# Allegro board sanT_4ch.brd
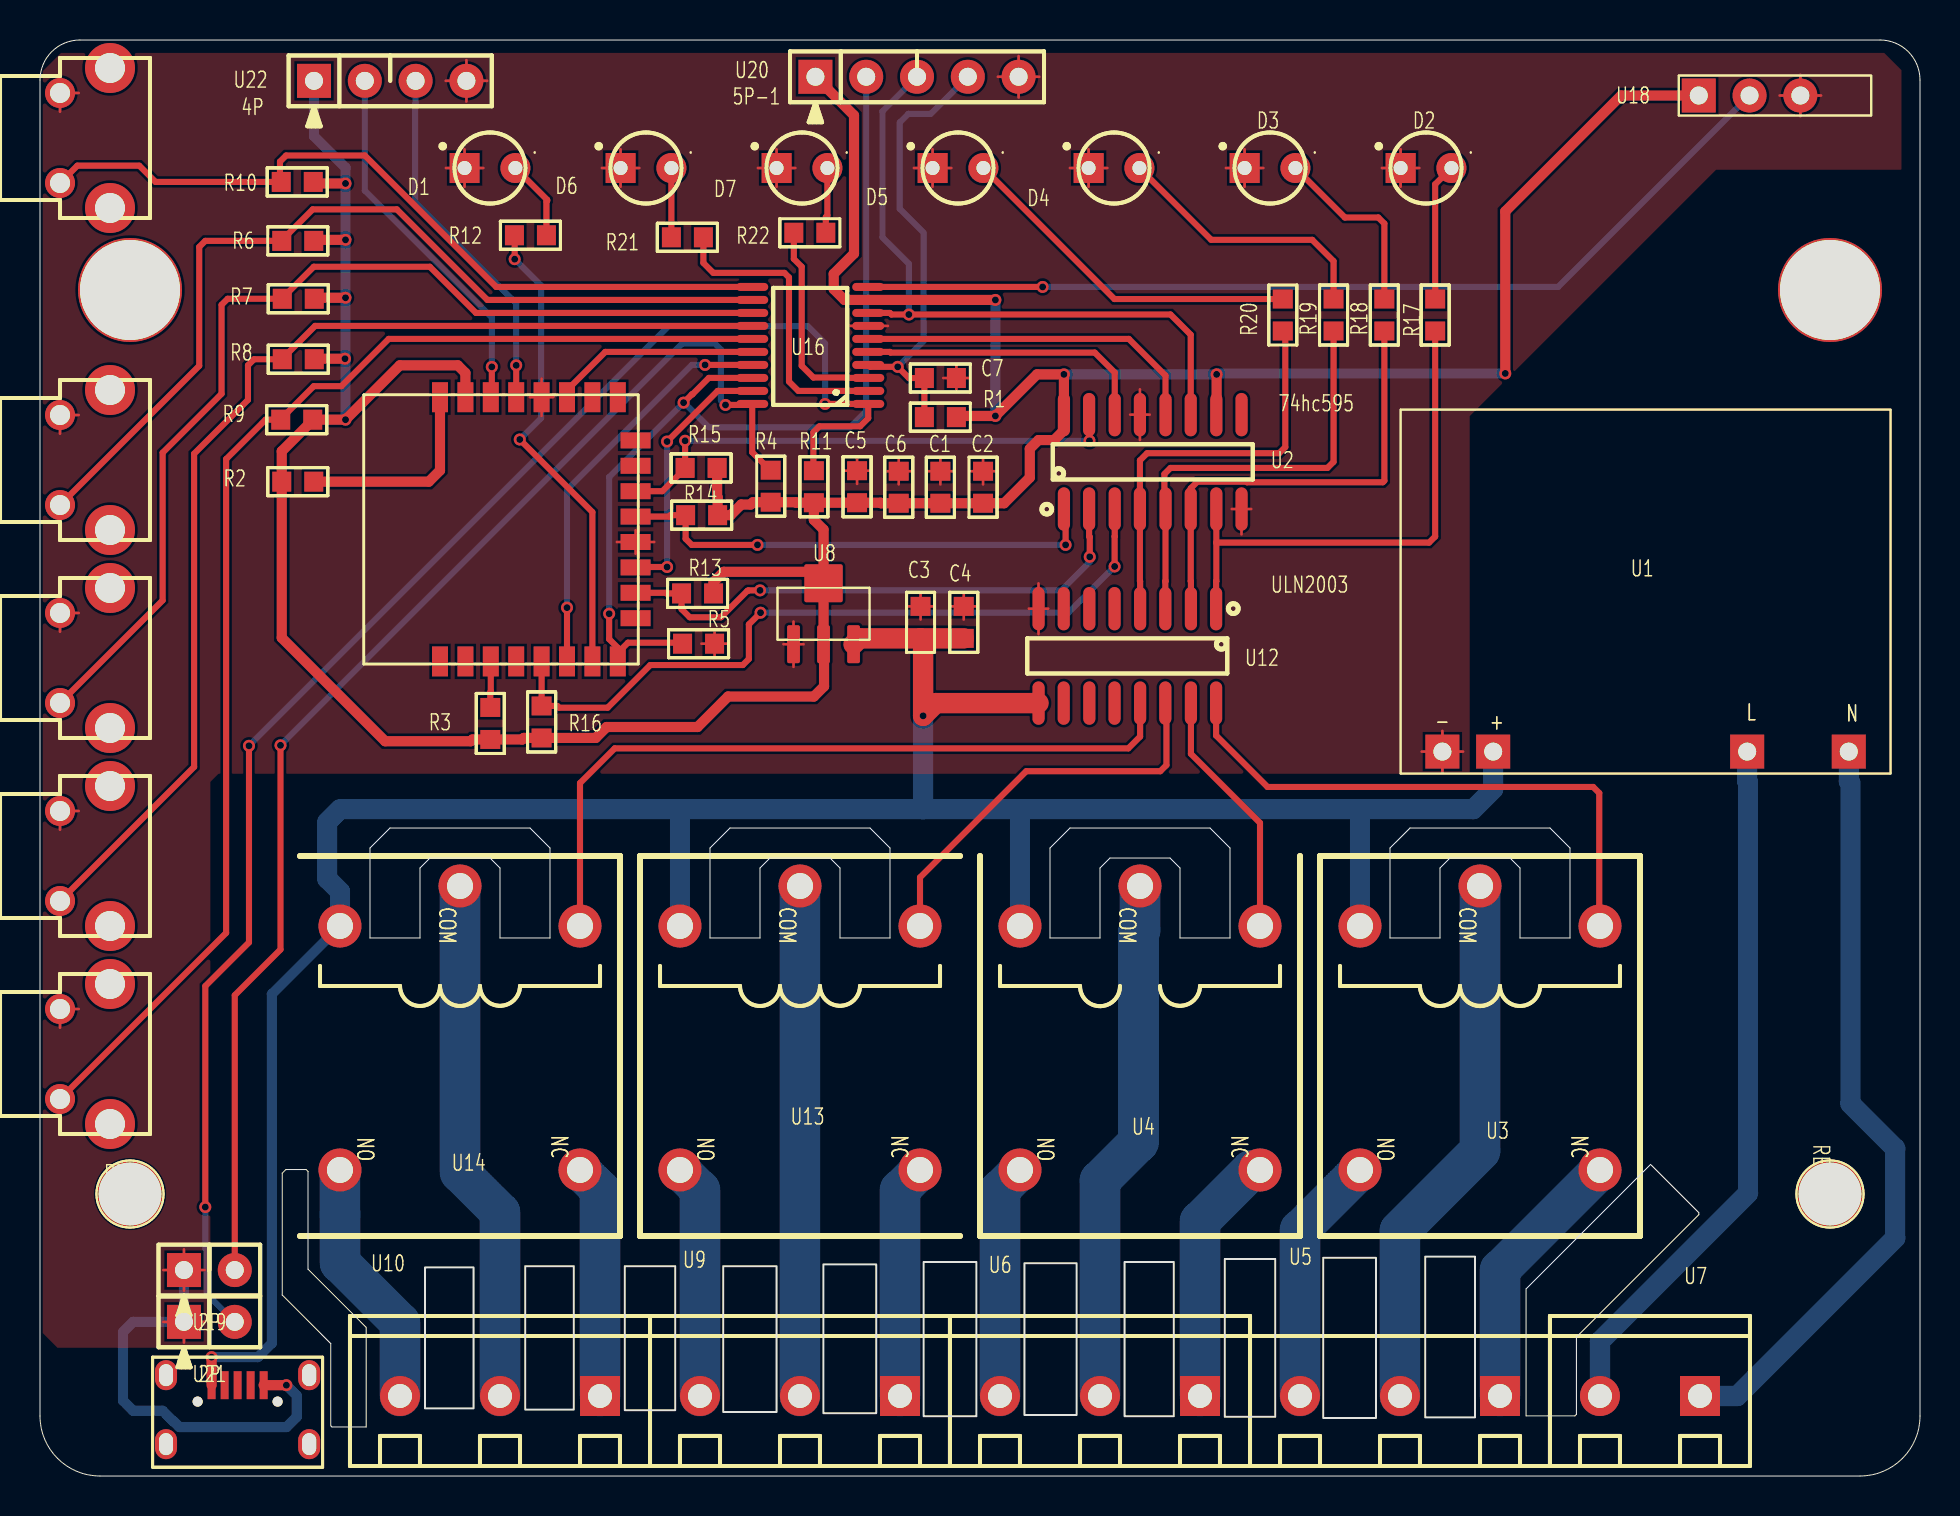
[diagram p0: board, top side]
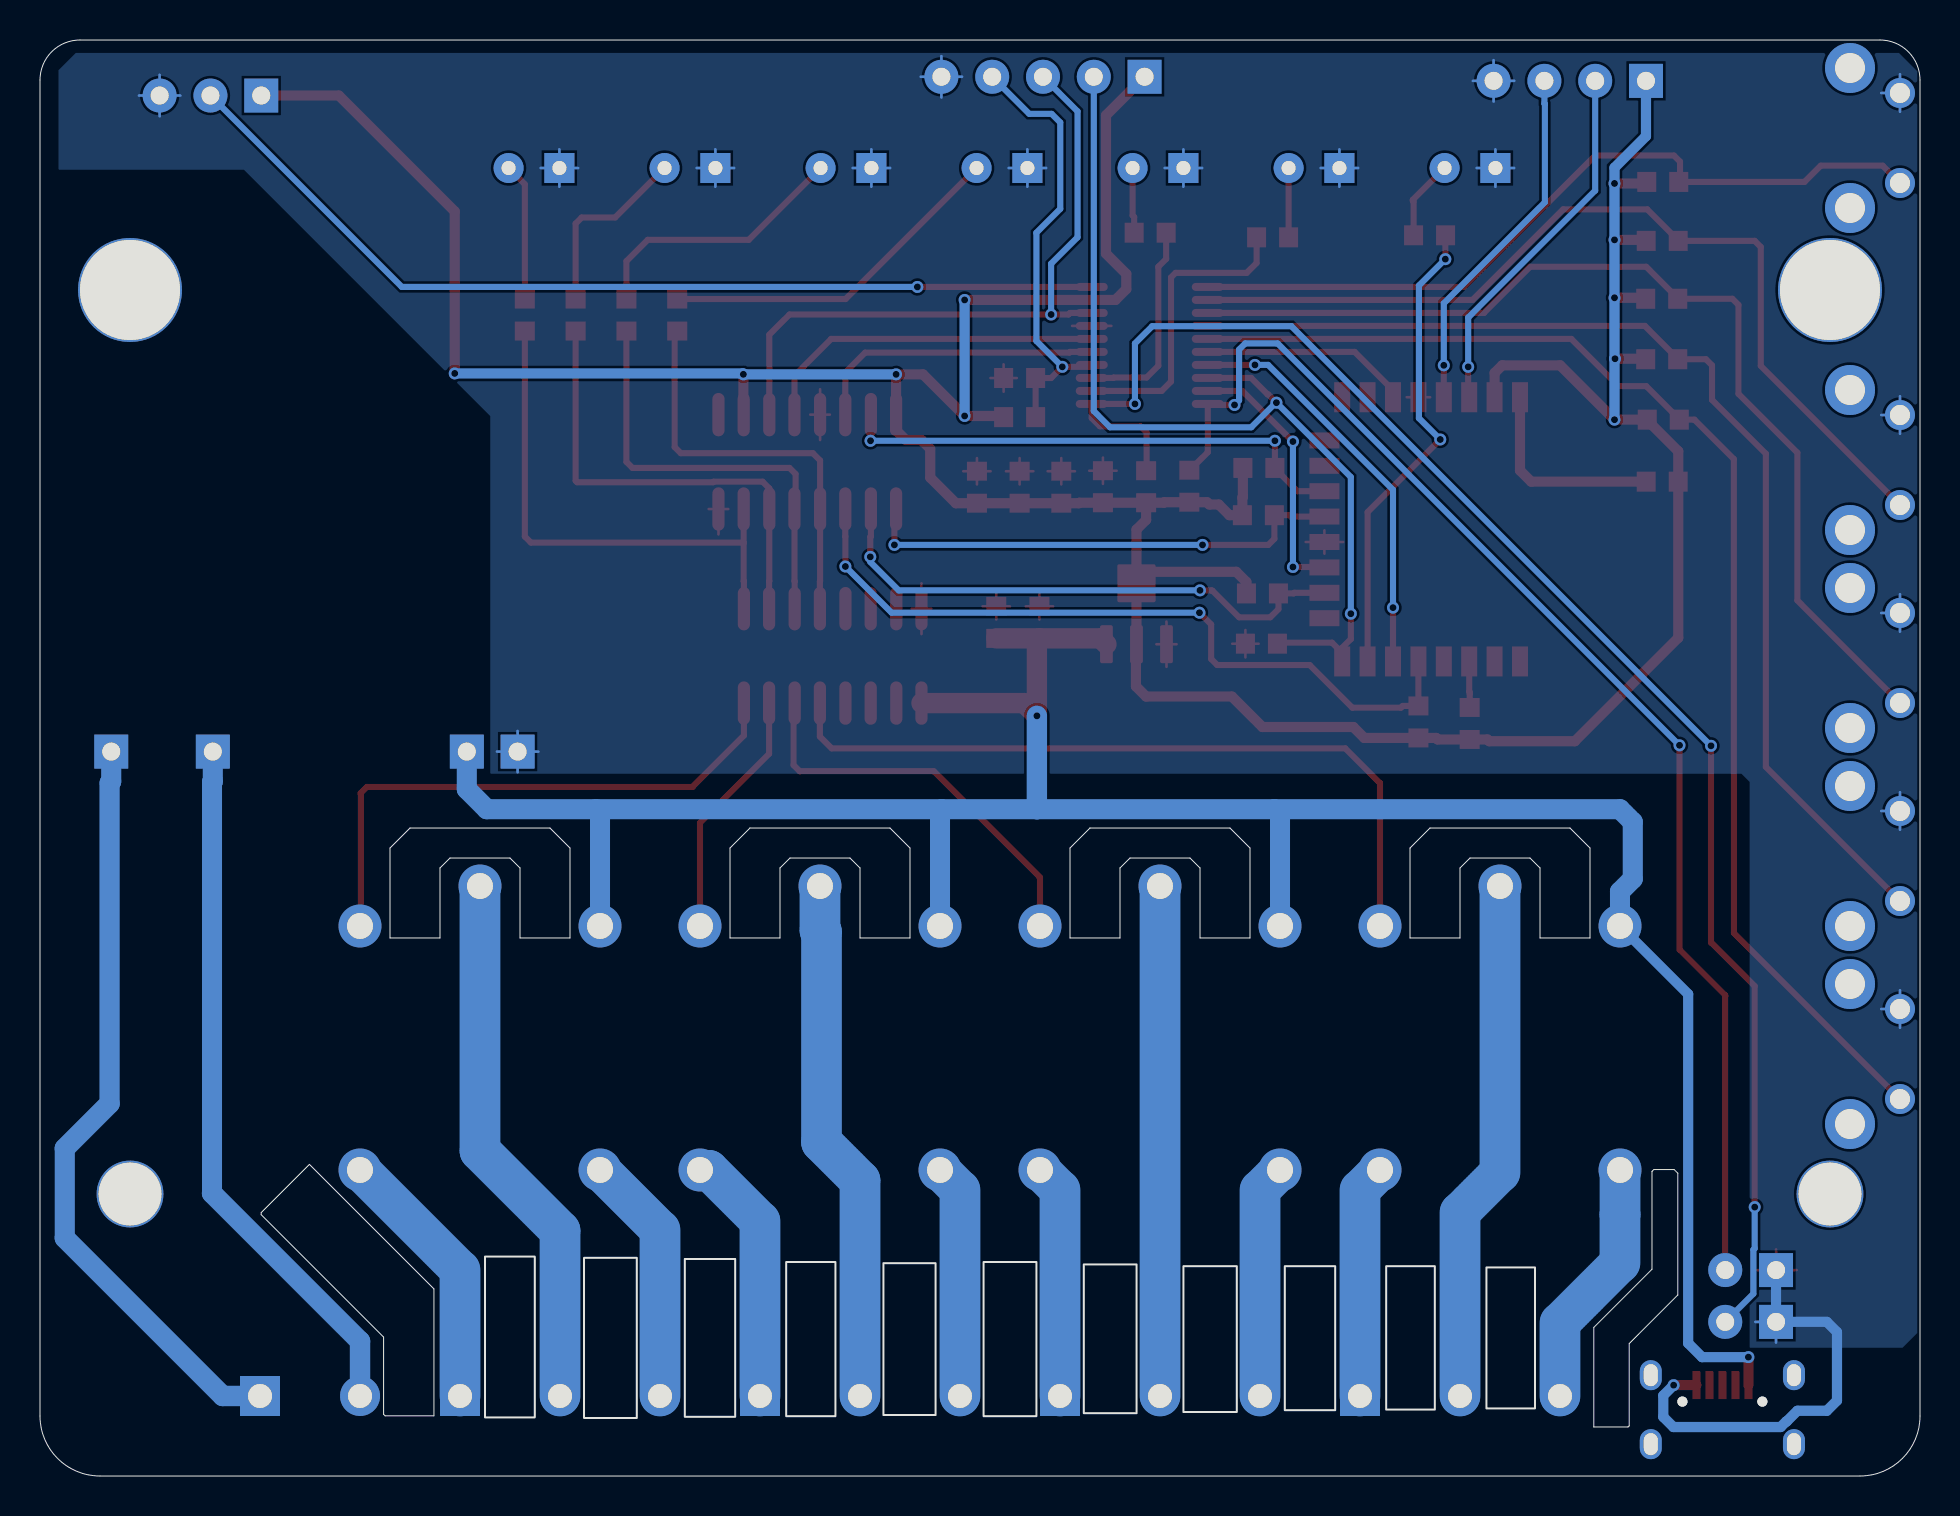
[diagram p1: board, bottom side, seen from below]

Outline 94 x 71.8 mm; copper layers: TOP, BOTTOM. Coordinates in mm from the lower left corner of the outline.
Outline path: rectangle 19.25,3.38 21.68,10.43 ; rectangle 24.26,3.32 26.69,10.49 ; rectangle 29.24,3.29 31.76,10.49 ; rectangle 34.16,3.2 36.83,10.49 ; rectangle 39.17,3.14 41.81,10.58 ; rectangle 44.18,2.99 46.82,10.7 ; rectangle 49.22,3.05 51.83,10.64 ; rectangle 54.23,2.99 56.69,10.7 ; rectangle 59.24,2.96 61.76,10.85 ; rectangle 64.16,2.9 66.8,10.91 ; rectangle 69.26,2.93 71.75,10.97 ; 0,69.8 arc(0.58,71.21) 2,71.8 92,71.8 arc(93.42,71.21) 94,69.8 94,3 arc(93.12,0.88) 91,0 3,0 arc(0.88,0.88) 0,3 0,69.8 ; 12.11,15.14 12.29,15.32 13.31,15.32 13.4,15.23 13.4,10.34 16.31,7.43 16.31,2.45 14.6,2.45 14.54,2.51 14.54,6.62 12.11,9.05 12.11,15.14 ; 16.5,31.4 16.5,26.9 19,26.9 19,30.4 19.5,30.9 22.5,30.9 23,30.4 23,26.9 25.5,26.9 25.5,31.4 24.5,32.4 17.5,32.4 16.5,31.4 ; 33.5,31.4 33.5,26.9 36,26.9 36,30.4 36.5,30.9 39.5,30.9 40,30.4 40,26.9 42.5,26.9 42.5,31.4 41.5,32.4 34.5,32.4 33.5,31.4 ; 50.5,31.4 50.5,26.9 53,26.9 53,30.4 53.5,30.9 56.5,30.9 57,30.4 57,26.9 59.5,26.9 59.5,31.4 58.5,32.4 51.5,32.4 50.5,31.4 ; 67.5,31.4 67.5,26.9 70,26.9 70,30.4 70.5,30.9 73.5,30.9 74,30.4 74,26.9 76.5,26.9 76.5,31.4 75.5,32.4 68.5,32.4 67.5,31.4 ; 74.31,9.36 80.53,15.58 82.94,13.17 82.94,13.07 76.82,6.94 76.82,3.08 76.74,3.01 74.31,3.01 74.31,9.36

## Placement (name value [footprint] x y rotation side)
C1  10UF/25V/0603  [STD0603]  45.02 49.44 90 top
C2  100NF/50V/0603  [STD0603]  47.15 49.44 90 top
C3  10UF/25V/0603  [STD0603]  44.03 42.68 90 top
C4  100NF/50V/0603  [STD0603]  46.19 42.68 90 top
C5  10UF/25V/0603  [STD0603]  40.85 49.46 90 top
C6  100NF/50V/0603  [STD0603]  42.94 49.44 90 top
C7  10UF/250V/0603  [STD0603]  45.02 54.9 0 top
D1  LED  [LED_3MM]  22.5 65.4 0 top
D2  LED  [LED_3MM]  69.3 65.4 0 top
D3  LED  [LED_3MM]  61.5 65.4 0 top
D4  LED  [LED_3MM]  53.7 65.4 0 top
D5  LED  [LED_3MM]  45.9 65.4 0 top
D6  LED  [LED_3MM]  30.3 65.4 0 top
D7  LED  [LED_3MM]  38.1 65.4 0 top
R1  1k/J/0603  [STD0603]  45.02 52.94 180 top
R2  10k/J/0603  [STD0603]  12.89 49.72 0 top
R3  10k/J/0603  [STD0603]  22.51 37.63 90 top
R4  1k/J/0603  [STD0603]  36.54 49.49 90 top
R5  10k/J/0603  [STD0603]  32.93 41.62 0 top
R6  1k/J/0603  [STD0603]  12.89 61.76 180 top
R7  1k/J/0603  [STD0603]  12.91 58.86 180 top
R8  1k/J/0603  [STD0603]  12.91 55.84 180 top
R9  1k/J/0603  [STD0603]  12.84 52.82 180 top
R10  1k/J/0603  [STD0603]  12.86 64.7 180 top
R11  1k/J/0603  [STD0603]  38.69 49.46 90 top
R12  1k/J/0603  [STD0603]  24.52 62.04 0 top
R13  1k/J/0603  [STD0603]  32.88 44.13 180 top
R14  1k/J/0603  [STD0603]  33.08 48.04 180 top
R15  1k/J/0603  [STD0603]  33.06 50.4 180 top
R16  1k/J/0603  [STD0603]  25.08 37.7 90 top
R17  1k/J/0603  [STD0603]  69.76 58.05 90 top
R18  1k/J/0603  [STD0603]  67.22 58.05 90 top
R19  1k/J/0603  [STD0603]  64.68 58.05 90 top
R20  1k/J/0603  [STD0603]  62.14 58.05 90 top
R21  1k/J/0603  [STD0603]  32.37 61.94 180 top
R22  1k/J/0603  [STD0603]  38.49 62.16 0 top
REF  -  [unnamed]  89.5 14.1 0 top
REF#2  -  [unnamed#2]  89.5 59.3 0 top
REF#3  -  [unnamed]  4.5 14.1 0 top
REF#4  -  [unnamed#2]  4.5 59.3 0 top
SW1  SW PUSHBUTTON  [TS-039]  1 50.8 270 top
SW2  SW PUSHBUTTON  [TS-039]  1 40.9 270 top
SW3  SW PUSHBUTTON  [TS-039]  1 31 270 top
SW4  SW PUSHBUTTON  [TS-039]  1 21.1 270 top
SW5  SW PUSHBUTTON  [TS-039]  1 66.9 270 top
U1  AC-DC5V  [AC_DC5V_RPD]  80.28 44.22 0 top
U2  74hc595  [SOIC127P600X175-16]  55.64 50.71 0 top
U3  SL-5V-RELAY  [HK3FF]  64 31 270 top
U4  SL-5V-RELAY  [HK3FF]  47 31 270 top
U5  3P  [TERMINAL-3P-5MM]  73 4 180 top
U6  3P  [TERMINAL-3P-5MM]  58 4 180 top
U7  2P  [TERMINAL-2P-5MM]  83 4 180 top
U8  AMS1117  [SOT89_AM1117]  39.18 43.11 0 top
U9  3P  [TERMINAL-3P-5MM]  43 4 180 top
U10  3P  [TERMINAL-3P-5MM]  28 4 180 top
U11  MICRO  [MICROUSB_B_4DIP]  9.88 4.54 0 top
U12  ULN2003  [SOIC127P600X175-16]  54.37 41.01 180 top
U13  SL-5V-RELAY  [HK3FF]  30 31 270 top
U14  SL-5V-RELAY  [HK3FF]  13 31 270 top
U16  N76E003  [TSOP65P640X120-20N]  38.21 56.8 180 top
U17  PSFB04  [PSF]  16.19 40.6 0 top
U18  433MODULE  [433MODULE_SYN480]  84.06 67.52 180 top
U19  2P  [ZCZ254-1X2]  7.2 10.3 0 top
U20  5P-1  [ZCZ254-1X5]  38.77 69.96 0 top
U21  2P  [ZCZ254-1X2]  7.2 7.71 0 top
U22  4P  [ZCZ254-1X4]  13.7 69.76 0 top

## Library data of the parts
C1-C7 = CAP NP
D1-D7 = LED
R1-R22 = R
SW1-SW5 = SW PUSHBUTTON
U1 = AC-DC5V
U2 = 74hc595: User Part Number: pn; Tolerance: RichardLC
U3 U4 U13 U14 = SL-5V-RELAY
U5 U6 U9 U10 = 3P
U7 = 2P
U8 = AMS1117
U11 = MICRO-USB
U12 = ULN2003: User Part Number: pn; Tolerance: RichardLC
U16 = N76E003
U17 = PSFB04
U18 = 433MODULE
U19 U21 = 2P: User Part Number: pn; Tolerance: RichardLC
U20 = 5P-1: User Part Number: pn; Tolerance: RichardLC
U22 = 4P-1: User Part Number: pn; Tolerance: RichardLC

## Footprints (pads in the part's own frame, mm; a bottom-side part is the same pattern mirrored in y, then rotated)
433MODULE_SYN480
  rect 1.699x1.699 hole 0.899: 1(1.12,-1.501)
  round 1.699 hole 0.899: 2(-1.42,-1.501) 3(-3.96,-1.501)
AC_DC5V_RPD
  rect 1.699x1.699 hole 0.899: 1(5.08,-8.001) 2(10.16,-8.001) 3(-7.62,-8.001) 4(-10.16,-8.001)
HK3FF
  round 2.149 hole 1.3: 1(1.501,8.001) 2(3.5,1.999) 3(15.7,1.999) 4(15.7,14) 5(3.5,14)
LED_3MM
  rect 1.501x1.501 hole 0.701: 1(-1.27,0)
  round 1.501 hole 0.701: 2(1.27,0)
MICROUSB_B_4DIP
  oval 1.1x1.501 hole 0.701x1.1: (-3.579,0.5) (-3.579,-2.949) (3.579,0.5) (3.579,-2.949)
  round 0.5 hole 0.701 unplated: (-1.999,-0.82) (1.999,-0.82)
  rect 0.399x1.4 smd: 1(-1.3,0) 2(-0.65,0) 3(0,0) 4(0.65,0) 5(1.3,0)
PSF
  rect 0.8x1.501 smd: 1(3.81,0.13) 2(5.08,0.13) 3(6.35,0.13) 4(7.62,0.13) 5(8.89,0.13) 6(10.16,0.13) 7(11.43,0.13) 8(12.7,0.13) 17(12.7,13.34) 18(11.43,13.34) 19(10.16,13.34) 20(8.89,13.34) 21(7.62,13.34) 22(6.35,13.34) 23(5.08,13.34) 24(3.81,13.34)
  rect 1.501x0.8 smd: 9(13.589,2.291) 10(13.589,3.561) 11(13.589,4.831) 12(13.589,6.101) 13(13.589,7.371) 14(13.589,8.641) 15(13.589,9.911) 16(13.589,11.181)
SOIC127P600X175-16
  oval 0.61x2.169 smd: 1(-4.44,-2.36) 2(-3.18,-2.36) 3(-1.9,-2.36) 4(-0.64,-2.36) 5(0.64,-2.36) 6(1.9,-2.36) 7(3.18,-2.36) 8(4.44,-2.36) 9(4.44,2.36) 10(3.18,2.36) 11(1.9,2.36) 12(0.64,2.36) 13(-0.64,2.36) 14(-1.9,2.36) 15(-3.18,2.36) 16(-4.44,2.36)
SOT89_AM1117
  custom 0.64x1.9 smd: 1(-1.501,-1.524) 2(0,-1.524) 3(1.501,-1.524)
  custom 1.92x1.9 smd: 4(0,1.524)
STD0603
  rect 0.95x1.001 smd: 1(-0.8,0) 2(0.8,0)
TERMINAL-2P-5MM
  rect 1.999x1.999 hole 1.199: 1(0,0)
  round 1.999 hole 1.199: 2(5.001,0)
TERMINAL-3P-5MM
  rect 1.999x1.999 hole 1.199: 1(0,0)
  round 1.999 hole 1.199: 2(5.001,0) 3(10,0)
TS-039
  round 2.499 hole 1.501: (-3.5,2.499) (3.5,2.499)
  round 1.501 hole 1.001: 1(-2.25,0) 2(2.25,0)
TSOP65P640X120-20N
  oval 1.6x0.399 smd: 1(-3.2,3.2) 2(-3.2,2.55) 3(-3.2,1.9) 4(-3.2,1.25) 5(-3.2,0.599) 6(-3.2,-0.051) 7(-3.2,-0.701) 8(-3.2,-1.349) 9(-3.2,-1.999) 10(-3.2,-2.649) 11(2.601,-2.649) 12(2.601,-1.999) 13(2.601,-1.349) 14(2.601,-0.701) 15(2.601,-0.051) 16(2.601,0.599) 17(2.601,1.25) 18(2.601,1.9) 19(2.601,2.55) 20(2.601,3.2)
unnamed
  round 3.34 hole 3.139 unplated: (0,0)
unnamed#2
  round 5.199 hole 5.001 unplated: (0,0)
ZCZ254-1X2
  rect 1.699x1.699 hole 0.899: 1(0,0)
  round 1.699 hole 0.899: 2(2.54,0)
ZCZ254-1X4
  rect 1.699x1.699 hole 0.899: 1(0,0)
  round 1.699 hole 0.899: 2(2.54,0) 3(5.08,0) 4(7.62,0)
ZCZ254-1X5
  rect 1.699x1.699 hole 0.899: 1(0,0)
  round 1.699 hole 0.899: 2(2.54,0) 3(5.08,0) 4(7.62,0) 5(10.16,0)

## Nets
GND: C1.2 C2.2 C3.2 C4.2 C5.2 C6.2 C7.2 D1.1(CATHODE) D2.1(CATHODE) D3.1(CATHODE) D4.1(CATHODE) D5.1(CATHODE) D6.1(CATHODE) D7.1(CATHODE) R5.2 SW1.1 SW2.1 SW3.1 SW4.1 SW5.1 U1.4(GND) U2.8(GND) U2.13(OE) U8.1(GND) U11.5(GND) U12.8(E) U16.7(GND) U17.12(GND#12) U17.20(GND#20) U18.3(GND) U19.1(COM) U20.5 U21.1(COM) U22.4
VCC3V3: C1.1 C2.1 C5.1 C6.1 R1.1 R2.1 R3.1 R4.1 R6.1 R7.1 R8.1 R9.1 R10.1 R11.1 R13.1 R14.1 R15.1 R16.1 U2.10(SCLR) U2.16(VCC) U8.2(VOUT0) U8.4(VOUT1) U16.9(VDD) U17.23(VCC) U18.1(VCC) U20.1 U22.1
VCC5V: C3.1 C4.1 U1.3(5V) U3.2(C+) U4.2(C+) U8.3(VIN) U11.1(VBUS) U12.9(COM) U13.2(C+) U14.2(C+)
433DATA: U16.10(P1.5) U18.2(DATA)
433LED: R22.1 U16.3(P0.7/RXD)
COM1: U3.1(COM) U5.2
COM2: U4.1(COM) U6.2
COM3: U9.2 U13.1(COM)
COM4: U10.2 U14.1(COM)
CON_KEY1: R6.2 SW1.2 U16.12(P1.3)
CON_KEY2: R7.2 SW2.2 U16.13(P1.2)
CON_KEY3: R8.2 SW3.2 U16.14(P1.1)
CON_KEY4: R9.2 SW4.2 U16.15(SPCLK/P1.0)
CON_KEY5: R10.2 SW5.2 U16.11(P1.4)
CON_RELAY1: R17.1 U2.7(QH) U12.1(1B)
CON_RELAY2: R18.1 U2.6(QG) U12.2(2B)
CON_RELAY3: R19.1 U2.5(QF) U12.3(3B)
CON_RELAY4: R20.1 U2.4(QE) U12.4(4B)
KEY1: R13.2 U2.2(QC) U17.10(IO0)
KEY2: R14.2 U2.1(QB) U17.13(IO9)
KEY3: R15.2 U2.15(QA) U17.14(IO10)
KEY4: R16.2 U2.3(QD) U17.5(IO14)
L: U1.1(L) U7.2(OPEN)
LIMIT1: R4.2 U16.20(P0.4) U19.2(OPEN)
LIMIT2: R11.2 U16.1(P0.5) U21.2(OPEN)
MODE_LED: R21.1 U16.2(P0.6/TXD)
N: U1.2(N) U7.1(COM)
NC1: U3.4(N_C) U5.1
NC2: U4.4(N_C) U6.1
NC3: U9.1 U13.4(N_C)
NC4: U10.1 U14.4(N_C)
NO1: U3.3(N_O) U5.3
NO2: U4.3(N_O) U6.3
NO3: U9.3 U13.3(N_O)
NO4: U10.3 U14.3(N_O)
R1: U3.5(C-) U12.16(1C)
R2: U4.5(C-) U12.15(2C)
R3: U12.14(3C) U13.5(C-)
R4: U12.13(4C) U14.5(C-)
RCK: U2.12(RCK) U16.6(P1.7/INT1)
RELAY1: U16.17(P0.1) U17.6(IO12)
RELAY2: U16.16(P0.0) U17.19(IO5)
RELAY3: U16.19(P0.3) U17.11(IO4)
RELAY4/CLK: R5.1 U16.18(ICPCK/P0.2) U17.8(IO15) U20.2
RST: C7.1 R1.2 U16.4(P2.0/RST) U20.4
RX: U17.21(RX) U22.3
SCK/DAT: U2.11(SCK) U16.8(P1.6/ICPDA/TXD-1) U20.3
SI: U2.14(SI) U16.5(P3.0/INTO)
SLED: R12.1 U17.7(IO13)
TX: U17.22(TX) U22.2
N03085: R2.2 U17.24(RESET)
N03089: R3.2 U17.3(EN)
N30331: D6.2(ANODE) R21.2
N30361: D7.2(ANODE) R22.2
N30561: D4.2(ANODE) R19.2
N30591: D5.2(ANODE) R20.2
N30836: D2.2(ANODE) R17.2
N30866: D3.2(ANODE) R18.2
N31028: D1.2(ANODE) R12.2

Pads without a net: U2 9; U11 2 3 4; U12 5 6 7 10 11 12; U17 1 2 4 9 15 16 17 18

## Via types
v1: diameter 0.599, hole 0.351, TOP to BOTTOM, 39 vias

## Routing (per net, layer and track width the routed paths; a pad name or vN(x,y) marks a point on that pad's centre or on a via; arc(x,y) is an arc through that point)
GND: length 187.5
  TOP w0.13: 44.34,50.24 C1.2 ; C1.2 45.02,50.9 ; C1.2 45.7,50.24 ; C1.2 45.02,49.58 ; C4.2 46.87,43.48 ; C4.2 45.5,43.48 ; C4.2 46.19,44.14 ; C4.2 46.19,42.82 ; U19.1 7.2,11.33 ; U19.1 8.23,10.3 ; U19.1 7.2,9.26 ; U19.1 6.16,10.3 ; 37.17,41.59 U8.1 ; U8.1 37.68,42.72 ; U8.1 38.18,41.59 ; U8.1 37.68,40.46 ; 42.4,57.51 U16.7 40.43,57.51 ; 29.78,46.12 U17.12 ; U17.12 30.71,46.7 ; U17.12 28.84,46.7 ; U17.12 29.78,47.28 ; U22.4 22.35,69.76 ; U22.4 21.32,70.79 ; U22.4 21.32,68.72 ; U22.4 20.29,69.76 ; 1,22.42 SW4.1 ; SW4.1 1,24.28 ; SW4.1 1.94,23.35 ; C5.2 41.54,50.26 ; C5.2 40.17,50.26 ; C5.2 40.85,50.92 ; C5.2 40.85,49.61 ; 60.23,64.47 D3.1 ; D3.1 60.23,66.33 ; D3.1 59.3,65.4 ; D3.1 61.17,65.4 ; D4.1 53.37,65.4 ; D4.1 51.5,65.4 ; D4.1 52.43,64.47 ; D4.1 52.43,66.33 ; U17.20 25.66,53.94 ; U17.20 25.08,54.87 ; U17.20 25.08,53 ; U17.20 24.5,53.94 ; U20.5 49.96,69.96 ; U20.5 47.9,69.96 ; U20.5 48.93,71 ; U20.5 48.93,68.93 ; 36.83,64.47 D7.1 ; D7.1 36.83,66.33 ; D7.1 35.9,65.4 ; D7.1 37.76,65.4 ; 70.12,35.19 U1.4 ; U1.4 71.15,36.22 ; U1.4 70.12,37.25 ; U1.4 69.09,36.22 ; SW1.1 1.94,53.05 ; SW1.1 1,53.99 ; SW1.1 1,52.12 ; C7.2 46.48,54.9 ; C7.2 45.82,54.22 ; C7.2 45.82,55.58 ; C7.2 45.16,54.9 ; U12.8 49.93,44.63 ; U12.8 50.41,43.37 ; U12.8 49.93,42.1 ; U12.8 49.44,43.37 ; D1.1 22.16,65.4 ; D1.1 21.23,64.47 ; D1.1 21.23,66.33 ; D1.1 20.29,65.4 ; SW2.1 1,44.09 ; SW2.1 1,42.22 ; SW2.1 1.94,43.15 ; 88.02,67.99 U18.3 ; U18.3 89.05,69.02 ; U18.3 86.98,69.02 ; U18.3 88.02,70.06 ; 43.35,43.48 C3.2 ; C3.2 44.03,42.82 ; C3.2 44.71,43.48 ; C3.2 44.03,44.14 ; 44.63,64.47 D5.1 ; D5.1 43.7,65.4 ; D5.1 45.57,65.4 ; D5.1 44.63,66.33 ; 42.94,49.58 C6.2 ; C6.2 42.94,50.9 ; C6.2 43.62,50.24 ; C6.2 42.25,50.24 ; 29.03,64.47 D6.1 ; D6.1 29.03,66.33 ; D6.1 28.09,65.4 ; D6.1 29.96,65.4 ; 68.03,64.47 D2.1 ; D2.1 68.97,65.4 ; D2.1 67.1,65.4 ; D2.1 68.03,66.33 ; 54.51,53.07 U2.13 ; U2.13 55.48,53.07 ; U2.13 55,51.8 ; U2.13 55,54.34 ; R5.2 34.39,41.62 ; R5.2 33.73,40.93 ; R5.2 33.73,42.3 ; R5.2 33.07,41.62 ; 46.47,50.24 C2.2 ; C2.2 47.84,50.24 ; C2.2 47.15,49.58 ; C2.2 47.15,50.9 ; U2.8 60.56,48.35 ; U2.8 60.08,47.08 ; U2.8 59.59,48.35 ; 1,32.32 SW3.1 ; SW3.1 1,34.19 ; SW3.1 1.94,33.25 ; 1,68.22 SW5.1 ; SW5.1 1,70.09 ; SW5.1 1.94,69.15 ; 6.16,7.71 U21.1 ; U21.1 7.2,6.67 ; U21.1 7.2,8.74 ; U21.1 8.23,7.71
  TOP w0.508: U11.5 v1(12.32,4.54)
  BOTTOM w0.13: SW2.1 1.94,43.15 ; SW2.1 1,42.22 ; SW2.1 1,44.09 ; 20.29,69.76 U22.4 ; U22.4 21.32,70.79 ; U22.4 21.32,68.72 ; U22.4 22.35,69.76 ; 47.9,69.96 U20.5 ; U20.5 49.96,69.96 ; U20.5 48.93,68.93 ; U20.5 48.93,71 ; 69.09,36.22 U1.4 ; U1.4 70.12,37.25 ; U1.4 71.15,36.22 ; U1.4 70.12,35.19 ; D5.1 44.63,66.33 ; D5.1 45.57,65.4 ; D5.1 44.63,64.47 ; D5.1 43.7,65.4 ; D3.1 60.23,66.33 ; D3.1 60.23,64.47 ; D3.1 61.17,65.4 ; D3.1 59.3,65.4 ; D1.1 22.16,65.4 ; D1.1 21.23,64.47 ; D1.1 21.23,66.33 ; D1.1 20.29,65.4 ; D7.1 36.83,66.33 ; D7.1 35.9,65.4 ; D7.1 37.76,65.4 ; D7.1 36.83,64.47 ; SW5.1 1.94,69.15 ; SW5.1 1,68.22 ; SW5.1 1,70.09 ; 1,32.32 SW3.1 ; SW3.1 1.94,33.25 ; SW3.1 1,34.19 ; SW4.1 1.94,23.35 ; SW4.1 1,22.42 ; SW4.1 1,24.28 ; 1,52.12 SW1.1 ; SW1.1 1.94,53.05 ; SW1.1 1,53.99 ; 29.03,64.47 D6.1 ; D6.1 28.09,65.4 ; D6.1 29.03,66.33 ; D6.1 29.96,65.4 ; D4.1 52.43,66.33 ; D4.1 51.5,65.4 ; D4.1 53.37,65.4 ; D4.1 52.43,64.47 ; 67.1,65.4 D2.1 ; D2.1 68.97,65.4 ; D2.1 68.03,66.33 ; D2.1 68.03,64.47 ; U18.3 88.02,70.06 ; U18.3 88.02,67.99 ; U18.3 86.98,69.02 ; U18.3 89.05,69.02 ; 7.2,6.67 U21.1 8.23,7.71
  BOTTOM w0.508: v1(12.32,4.54) 12.84,4.02 12.84,2.96 12.33,2.45 6.97,2.45 6.69,2.73 6.66,2.73 6.13,3.26 4.66,3.26 4.15,3.77 4.15,7.2 4.66,7.71 U21.1 U19.1 7.2,10.35
VCC3V3: length 193.6
  TOP w0.508: R15.1 33.86,48.95 33.88,48.93 R14.1 34.53,48.04 35.06,48.57 35.53,48.57 35.65,48.69 R4.1 37.78,48.69 37.81,48.66 R11.1 ; R11.1 38.69,47.8 39.18,47.32 U8.4 ; R11.1 C5.1 42.02,48.66 42.05,48.64 C6.1 C1.1 C2.1 48.21,48.64 49.49,49.92 49.49,51.36 49.93,51.8 50.71,51.8 51.2,52.29 U2.16 v1(51.2,55.08) 49.85,55.08 v1(47.77,53) 45.88,53 R1.1 ; v1(47.77,58.8) U16.9 40.23,58.8 39.68,59.34 39.68,60.11 40.7,61.12 40.7,68.03 U20.1 ; R7.1 13.76,58.91 v1(15.28,58.91) ; v1(73.26,55.13) 73.26,63.23 79.06,69.02 U18.1 ; U8.4 38.61,45.21 34.19,45.21 33.68,44.7 R13.1 ; U8.4 U8.2 39.2,41.56 39.2,39.48 38.69,38.97 34.4,38.97 32.88,37.45 28.33,37.45 27.79,36.9 R16.1 24.19,36.9 24.12,36.83 R3.1 21.63,36.83 21.54,36.74 17.26,36.74 12.09,41.91 R2.1 12.09,51.24 13.64,52.79 R9.1 v1(15.28,52.82) 17.99,55.53 20.89,55.53 21.27,55.15 U17.23 ; v1(15.25,55.86) 13.74,55.86 R8.1 ; v1(58.83,55.08) 58.83,53.08 U2.10 ; v1(15.28,64.63) 13.74,64.63 R10.1 ; v1(15.28,61.81) 13.74,61.81 R6.1
  BOTTOM w0.508: 15.28,55.86 v1(15.28,58.91) v1(15.28,61.81) v1(15.28,64.63) 15.28,65.42 13.7,66.99 U22.1 ; 15.28,55.86 v1(15.25,55.86) ; 15.28,55.86 v1(15.28,52.82) ; v1(51.2,55.08) v1(58.83,55.08) 58.88,55.13 v1(73.26,55.13) ; v1(47.77,58.8) v1(47.77,53)
VCC5V: length 131.4
  TOP w0.508: U11.1 v1(8.58,5.94)
  TOP w1.016: U8.3 40.97,41.88 C3.1 ; U12.9 44.79,38.65 v1(44.16,38.01) 44.16,41.76 C3.1 ; C3.1 C4.1
  BOTTOM w0.3: 48.92,33.34 49,33.42
  BOTTOM w0.5: 15,27.5 U14.2
  BOTTOM w0.508: U14.2 11.59,24.09 11.59,6.64 10.9,5.94 v1(8.58,5.94)
  BOTTOM w1.001: 48.92,33.34 49,33.26 U4.2 ; 48.92,33.34 32.28,33.34 ; 48.92,33.34 66.2,33.34 ; 32.28,33.34 15,33.34 14.36,32.7 14.36,29.86 15,29.22 15,27.5 U14.2 ; 32.28,33.34 32,33.06 U13.2 ; U1.3 72.66,34.34 71.66,33.34 66.2,33.34 ; 66.2,33.34 66,33.14 U3.2
  BOTTOM w1.016: v1(44.16,38.01) 44.16,33.34
433DATA: length 48
  TOP w0.305: U16.10 v1(50.13,59.45)
  BOTTOM w0.305: v1(50.13,59.45) 75.91,59.45 U18.2
433LED: length 10.4
  TOP w0.305: R22.1 37.69,60.86 38.08,60.46 38.08,55.51 38.67,54.92 40.31,54.92 40.33,54.9 U16.3
COM1: length 27.2
  BOTTOM w2.032: U5.2 68,12.26 72,16.26 U3.1
COM2: length 26.3
  BOTTOM w2.032: U6.2 53,14.77 54.92,16.7 54.92,27.2 55,27.28 U4.1
COM3: length 25.5
  BOTTOM w2.032: U9.2 38,29.5 U13.1
COM4: length 26.3
  BOTTOM w1.999: 21,15.18 23,13.18
  BOTTOM w2.032: 23,13.18 U10.2 ; U14.1 21,15.18
CON_KEY1: length 46.1
  TOP w0.305: U16.12 22.37,58.8 17.84,63.33 13.64,63.33 12.09,61.78 R6.2 8.27,61.76 7.96,61.45 7.96,55.51 SW1.2
CON_KEY2: length 51.5
  TOP w0.305: SW2.2 6.13,43.78 6.13,51.17 9.08,54.11 9.08,58.56 9.38,58.86 R7.2 12.11,58.89 13.69,60.46 19.49,60.46 21.8,58.15 U16.13
CON_KEY3: length 56.7
  TOP w0.305: U16.14 13.75,57.51 12.11,55.86 R8.2 10.7,55.84 10.4,55.53 10.4,53.81 7.71,51.11 7.71,35.46 SW3.2
CON_KEY4: length 64.2
  TOP w0.305: U16.15 17.43,56.86 15.07,54.49 13.69,54.49 12.04,52.84 R9.2 11.28,52.82 9.31,50.85 9.31,27.16 SW4.2
CON_KEY5: length 39.3
  TOP w0.305: U16.11 22.81,59.45 16.24,66.02 12.3,66.02 12,65.72 12,64.77 R10.2 5.78,64.7 4.96,65.52 1.87,65.52 SW5.2
CON_RELAY1: length 26.3
  TOP w0.305: R17.1 69.76,46.97 69.45,46.67 58.82,46.67 ; U2.7 58.82,46.67 ; 58.82,46.67 58.82,44.74 58.81,44.73 U12.1
CON_RELAY2: length 23.4
  TOP w0.305: R18.1 67.22,49.76 67.14,49.69 60.35,49.69 60.32,49.72 57.87,49.72 57.54,49.38 U2.6 57.54,44.74 57.55,44.73 U12.2
CON_RELAY3: length 22
  TOP w0.305: U12.3 56.27,44.73 56.28,44.74 U2.5 56.22,48.4 56.22,50.1 56.53,50.4 64.37,50.4 64.68,50.71 R19.1
CON_RELAY4: length 20.8
  TOP w0.305: U12.4 55.01,44.73 55,44.74 U2.4 55,50.78 55.36,51.14 61.96,51.14 62.27,51.45 62.27,57.12 R20.1
KEY1: length 27.5
  TOP w0.305: v1(36,44.28) 35.42,44.28 35.39,44.26 35.37,44.26 34.05,42.94 32.49,42.94 32.08,43.35 R13.2 31.32,44.13 31.29,44.16 U17.10 ; U2.2 52.46,46.98 52.49,46.95 v1(52.49,45.96)
  BOTTOM w0.305: v1(36,44.28) 51.06,44.28 52.49,45.7 v1(52.49,45.96)
KEY2: length 24.7
  TOP w0.305: U2.1 51.28,48.27 v1(51.28,46.56) ; U17.13 31.45,47.97 31.52,48.04 R14.2 32.28,46.86 32.59,46.56 v1(35.87,46.56)
  BOTTOM w0.305: v1(35.87,46.56) v1(51.28,46.56)
KEY3: length 25.9
  TOP w0.305: U17.14 31.12,49.24 32.26,50.38 R15.2 v1(32.26,51.76) ; v1(52.47,51.76) 52.47,53.05 U2.15
  BOTTOM w0.305: v1(32.26,51.76) v1(52.47,51.76)
KEY4: length 37.7
  TOP w0.305: v1(53.73,45.48) 53.73,46.97 53.74,46.98 U2.3 ; v1(36.03,43.16) 35.44,42.58 35.44,40.85 35.14,40.55 30.52,40.55 28.38,38.41 25.95,38.41 25.86,38.5 R16.2 U17.5
  BOTTOM w0.305: v1(53.73,45.48) 51.42,43.16 v1(36.03,43.16)
L: length 35.3
  BOTTOM w1.001: U1.1 85.36,34.73 85.4,34.69 85.4,14.14
  BOTTOM w1.016: U7.2 78,6.74 85.4,14.14 ; U1.1 85.31,36.22
LIMIT1: length 65.6
  TOP w0.305: v1(12.02,36.54) 12.02,26.32 9.74,24.04 U19.2 ; R4.2 36.51,50.29 35.61,51.19 U16.20 35.56,53.55 v1(34.27,53.55)
  BOTTOM w0.305: v1(34.27,53.55) 34.05,53.78 34.05,56.32 33.74,56.63 32.12,56.63 v1(12.02,36.54)
LIMIT2: length 79
  TOP w0.305: R11.2 38.67,50.29 38.67,52.18 38.97,52.49 41.01,52.49 41.41,52.89 U16.1 v1(39.25,53.6) ; v1(10.45,36.51) 10.45,26.68 8.27,24.5 v1(8.27,13.45)
  BOTTOM w0.305: v1(39.25,53.6) 39.25,56.63 38.39,57.49 31.43,57.49 v1(10.45,36.51) ; v1(8.27,13.45) 8.27,11.38 8.33,11.31 8.33,9.11 U21.2
MODE_LED: length 15.2
  TOP w0.305: R21.1 33.17,60.65 33.67,60.16 37.22,60.16 37.45,59.93 37.45,54.72 37.92,54.25 U16.2
N: length 38.3
  BOTTOM w1.001: 90.52,18.62 90.52,34.65 90.44,34.73 U1.2 ; 92.76,11.9 92.76,16.38
  BOTTOM w1.016: 92.76,11.9 84.86,4 U7.1 ; U1.2 90.42,36.22 ; 92.76,16.38 90.52,18.62
NC1: length 13.4
  BOTTOM w1.999: 73,10.3 U3.4
  BOTTOM w2.032: U5.1 73,10.3
NC2: length 12.8
  BOTTOM w1.999: 58,12.74 60.56,15.3 U4.4
  BOTTOM w2.032: U6.1 58,12.74
NC3: length 11.7
  BOTTOM w1.999: 43,14.3 U13.4
  BOTTOM w2.032: U9.1 43,14.3
NC4: length 11.7
  BOTTOM w1.999: 28,14.3 U14.4
  BOTTOM w2.032: U10.1 28,14.3
NO1: length 12.5
  BOTTOM w1.999: 63,12.3 U3.3
  BOTTOM w2.032: U5.3 63,12.3
NO2: length 11.7
  BOTTOM w1.999: 48,14.3 U4.3
  BOTTOM w2.032: U6.3 48,14.3
NO3: length 11.7
  BOTTOM w1.999: 33,14.3 U13.3
  BOTTOM w2.032: U9.3 33,14.3
NO4: length 12.5
  BOTTOM w1.999: 18,7.66 15,10.66
  BOTTOM w2.032: 15,10.66 15,13.08 15,13.08 U14.3 ; U10.3 18,7.66
R1: length 28.6
  TOP w0.305: U3.5 77.96,27.54 77.96,34.15 77.66,34.45 61.38,34.45 58.81,37.02 U12.16
R2: length 12.6
  TOP w0.305: U12.15 57.55,36.11 61,32.65 U4.5
R3: length 20.2
  TOP w0.305: U13.5 44,29.93 49.31,35.24 56.02,35.24 56.32,35.54 56.32,38.59 U12.14
R4: length 37.8
  TOP w0.305: U12.13 55.01,36.97 54.42,36.38 28.74,36.38 27,34.65 U14.5
RCK: length 17.6
  TOP w0.305: U16.6 54.44,56.86 56.28,55.02 U2.12
RELAY1: length 20.4
  TOP w0.305: v1(26.35,43.42) U17.6 ; U16.17 v1(33.25,55.55)
  BOTTOM w0.305: v1(33.25,55.55) 32.59,55.55 26.35,49.31 v1(26.35,43.42)
RELAY2: length 10.4
  TOP w0.305: U17.19 26.35,54.29 28.27,56.21 U16.16
RELAY3: length 13.2
  TOP w0.305: U17.11 29.8,45.45 v1(31.35,45.45) ; U16.19 33.88,54.25 v1(31.35,51.72)
  BOTTOM w0.305: v1(31.35,51.72) v1(31.35,45.45)
RELAY4/CLK: length 48.8
  TOP w0.305: 28.89,41.16 28.89,41.41 28.46,41.84 v1(28.46,43.11) ; 28.89,41.16 29.4,41.67 32.08,41.67 R5.1 ; 28.89,41.16 U17.8 ; U16.18 33.44,54.9 32.62,54.08 32.59,54.08 v1(32.18,53.67)
  BOTTOM w0.305: v1(28.46,43.11) 28.46,49.95 v1(32.18,53.67) 32.2,53.67 33.44,52.44 40.5,52.44 41.31,53.25 U20.2
RST: length 22.6
  TOP w0.305: U16.4 41.51,55.46 v1(42.89,55.46) 43.44,54.9 C7.1 R1.2
  BOTTOM w0.305: U20.4 44.54,68.11 43.42,68.11 42.99,67.68 42.99,63.36 44.18,62.16 44.18,56.75 v1(42.89,55.46)
RX: length 17.9
  TOP w0.305: U17.21 v1(23.81,55.53)
  BOTTOM w0.305: v1(23.81,55.53) 23.81,58.63 18.76,63.69 18.76,68.6 18.78,68.63 U22.3
SCK/DAT: length 33.7
  TOP w0.305: U2.11 57.54,57.06 56.53,58.07 v1(43.44,58.07) 42.58,58.07 42.5,58.15 U16.8
  BOTTOM w0.305: v1(43.44,58.07) 43.44,60.61 42.12,61.94 42.12,68.23 U20.3
SI: length 14.9
  TOP w0.305: U2.14 53.74,55.17 52.74,56.17 42.53,56.17 42.5,56.21 U16.5
SLED: length 23.8
  TOP w0.305: U17.7 27.62,48.19 v1(23.99,51.83) ; v1(23.73,60.84) 23.73,62.02 R12.1
  BOTTOM w0.305: v1(23.99,51.83) 25.05,52.89 25.05,59.52 v1(23.73,60.84)
TX: length 18.5
  TOP w0.305: v1(22.59,55.46) 22.59,53.99 U17.22
  BOTTOM w0.305: U22.2 16.24,64.27 22.59,57.92 v1(22.59,55.46)
N03085: length 10.2
  TOP w0.508: R2.2 19.44,49.72 20,50.28 U17.24
N03089: length 2.4
  TOP w0.13: 22.51,39.1 22.54,39.12 22.54,39.21
  TOP w0.305: U17.3 22.54,39.21 22.51,39.19 R3.2
N30331: length 3.5
  TOP w0.305: D6.2 R21.2
N30361: length 3.3
  TOP w0.305: D7.2 39.37,63.03 39.29,62.95 R22.2
N30561: length 13.5
  TOP w0.305: R19.2 64.68,60.74 63.61,61.81 58.56,61.81 D4.2
N30591: length 17.7
  TOP w0.305: D5.2 53.72,58.85 R20.2
N30836: length 6.9
  TOP w0.305: R17.2 69.76,64.59 D2.2
N30866: length 9.4
  TOP w0.305: D3.2 65.24,62.93 66.91,62.93 67.22,62.62 R18.2
N31028: length 4
  TOP w0.305: R12.2 25.32,63.73 25.36,63.76 25.36,63.81 D1.2

## Copper pours and planes (outline as drawn; the poured copper is in the pictures)
GND on TOP: 0.14,70.24 0.14,7.15 0.87,6.41 8.52,6.41 8.52,34.71 8.93,35.11 71.49,35.11 71.49,52.99 83.8,65.31 93.08,65.31 93.08,70.29 92.21,71.16 1.05,71.16
GND on BOTTOM: 0.14,70.24 0.14,7.15 0.87,6.41 8.49,6.41 8.52,6.44 8.52,34.71 8.93,35.11 71.49,35.11 71.49,52.99 83.8,65.31 93.08,65.31 93.08,70.29 92.21,71.16 1.05,71.16

## Text on the board
COMPVAL_TYPE_TOP: FIGURE | SIZE | 13.8 | 27.6 | 35.4 | 39.4 | 47.2 | 51.2 | 59.1 | 123.6 | 196.9 | 43.3x27.6 | DRILL CHART: TOP to BOTTOM | ALL UNITS ARE IN MILS | PLATED | NON-PLATED | QTY | 39 | 14 | 20 | 10 | 2 | 4
